# EAGLE board CMOS_Synthesizer_V2_REVB (EAGLE 9.6.2), part 1 of 2
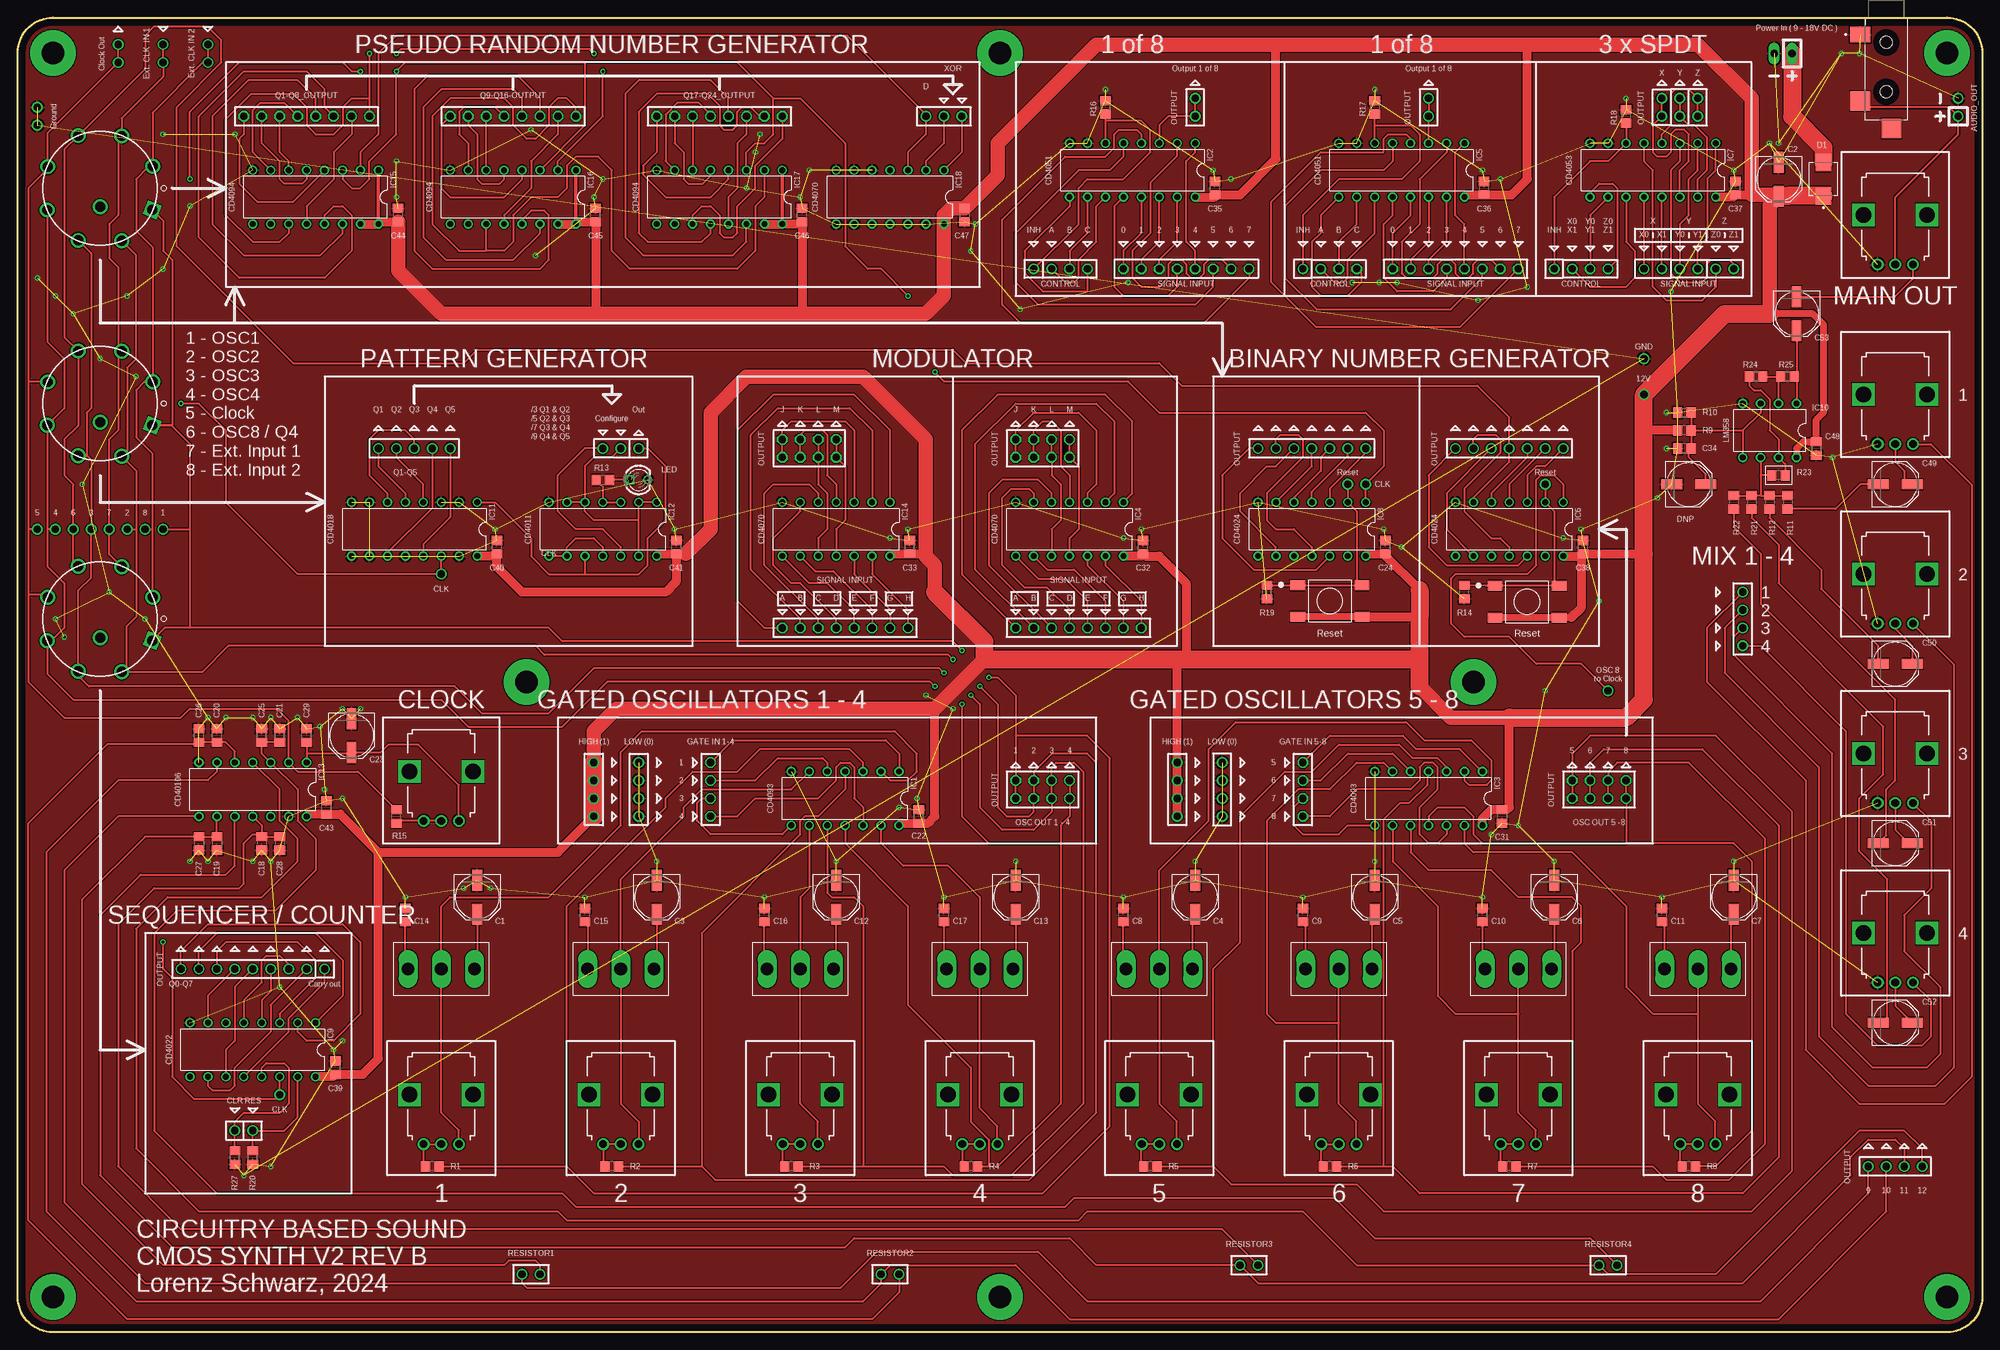
[diagram p0: board, top side]
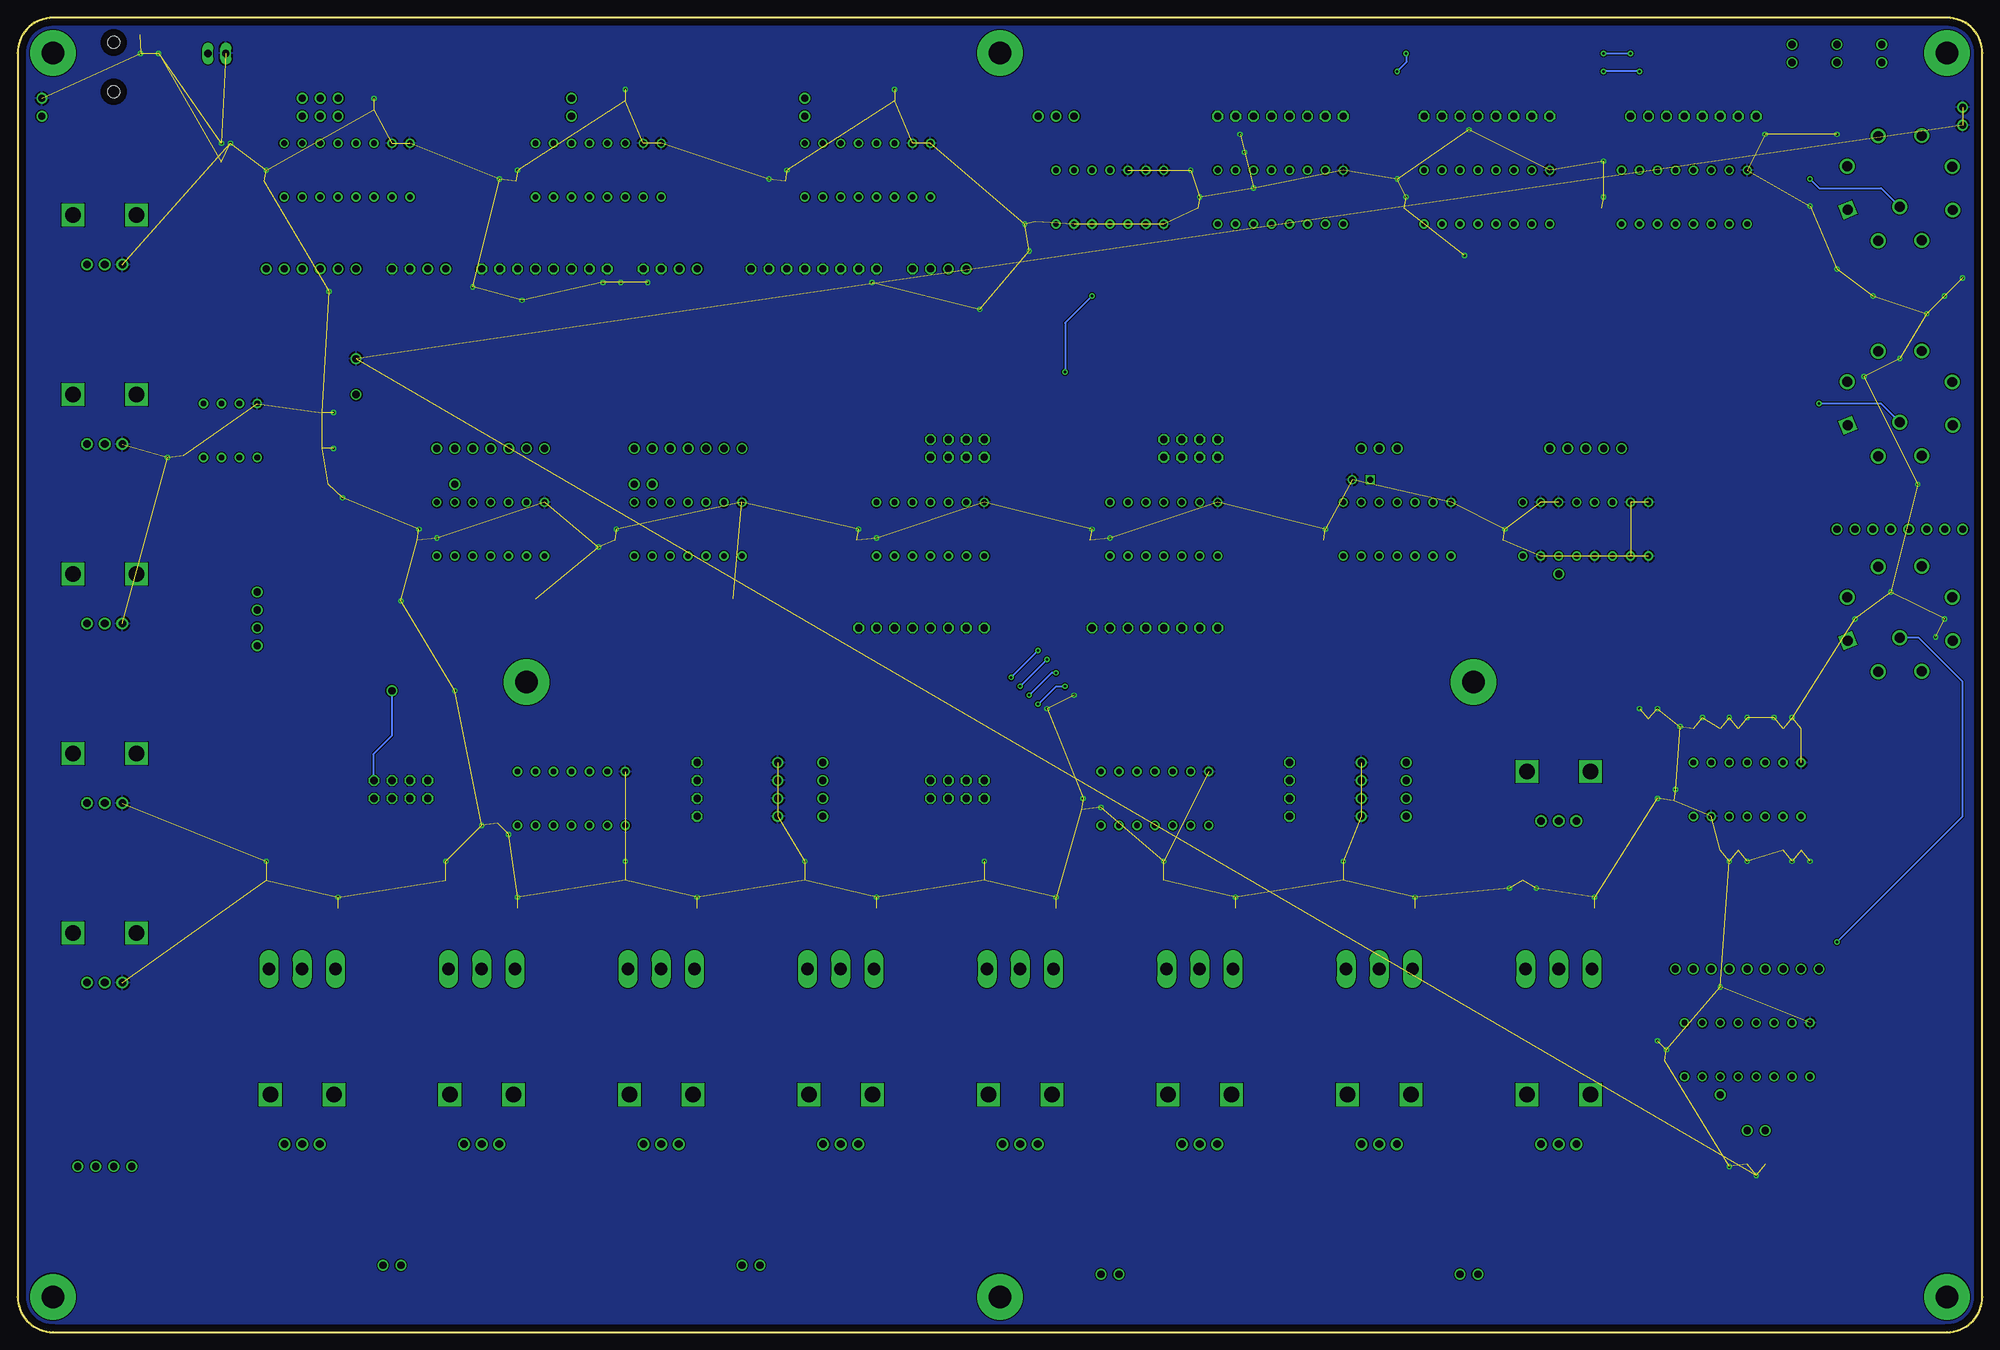
[diagram p1: board, bottom side, seen from below]

Size 278 x 186 mm. Coordinates in mm from the lower left corner, seen from the top.
Outline: 5,0 arc-90 0,5 0,181 arc-90 5,186 273,186 arc-90 278,181 278,5 arc-90 273,0 5,0
Copper layers (1*16): Top 0.035mm / dielectric 1.5mm / Bottom 0.035mm
Design rules "default": minimum track width 6mil, minimum drill 0.35mm, track to track 6mil, track to pad 6mil, pad to pad 6mil, via to via 6mil, smd to smd 6mil, copper to edge 40mil, drill to drill 6mil, minimum pad ring 10mil, minimum via ring 8mil, stop-mask expansion 4mil, vias tented up to drill 0mil, thermal gap 10mil

## Footprints (pad centres in the part's own frame; a part is rotated, then mirrored left to right if it is on the bottom)
1X01 = drill 1.016: 1 0,0
1X04 = drill 1.016 octagon: 1 -3.81,0; 2 -1.27,0; 3 1.27,0; 4 3.81,0
1X03 = drill 1.016 octagon: 1 -2.54,0; 2 0,0 | drill 1.016: 3 2.54,0
1X02 = drill 1.016: 1 -1.27,0; 2 1.27,0
PANASONIC_D = smd 3 x 1.4: + 2.4,0; - -2.4,0
C0805 = smd 1.3 x 1.5: 1 -0.95,0; 2 0.95,0
DIO_MBRS140 = smd 2.5 x 2.2: A 2.35,0; C -2.35,0
1X04' = drill 1.016: 1 -3.81,0; 2 -1.27,0; 3 1.27,0; 4 3.81,0
DIL14 = drill 0.813: 1 -7.62,-3.81; 2 -5.08,-3.81; 3 -2.54,-3.81; 4 0,-3.81; 5 2.54,-3.81; 6 5.08,-3.81; 7 7.62,-3.81; 8 7.62,3.81; 9 5.08,3.81; 10 2.54,3.81; 11 0,3.81; 12 -2.54,3.81; 13 -5.08,3.81; 14 -7.62,3.81
DIL16 = drill 0.813: 1 -8.89,-3.81; 2 -6.35,-3.81; 3 -3.81,-3.81; 4 -1.27,-3.81; 5 1.27,-3.81; 6 3.81,-3.81; 7 6.35,-3.81; 8 8.89,-3.81; 9 8.89,3.81; 10 6.35,3.81; 11 3.81,3.81; 12 1.27,3.81; 13 -1.27,3.81; 14 -3.81,3.81; 15 -6.35,3.81; 16 -8.89,3.81
DIL08 = drill 0.813 pad 1.27: 1 -3.81,-3.81; 2 -1.27,-3.81; 3 1.27,-3.81; 4 3.81,-3.81; 5 3.81,3.81; 6 1.27,3.81; 7 -1.27,3.81; 8 -3.81,3.81
CUI_MJ-3523-SMT-TR = smd 2.8 x 2.2: 1 3.7,2.4 | smd 2.8 x 2.8: 2 3.7,11.8; 10 -0.75,15.7 | hole 1.7: 0,3.5; 0,10.5
1X02' = drill 1.016 long: 1 -1.27,0; 2 1.27,0
1X07 = drill 1.016: 1 -7.62,0; 2 -5.08,0; 3 -2.54,0; 4 0,0; 5 2.54,0; 6 5.08,0; 7 7.62,0
LED2-2.54-D3.0MM = drill 0.813 square: A -1.27,0 | drill 0.813: K 1.27,0
MOUNT_CH32 = drill 3.175 pad 6.452: P$1 0,0
1X08 = drill 1.016: 1 -8.89,0; 2 -6.35,0; 3 -3.81,0; 4 -1.27,0; 5 1.27,0; 6 3.81,0; 7 6.35,0; 8 8.89,0
1X05 = drill 1.016: 1 -5.08,0; 2 -2.54,0; 3 0,0; 4 2.54,0; 5 5.08,0
1X08' = drill 1.016 octagon: 1 -8.89,0; 2 -6.35,0; 3 -3.81,0; 4 -1.27,0; 5 1.27,0; 6 3.81,0; 7 6.35,0; 8 8.89,0
R0805 = smd 1.3 x 1.5: 1 -0.95,0; 2 0.95,0
M9040P = drill 1.778 pad 2.286 long: 1 0,4.699; 2 0,0; 3 0,-4.699
ROTARY = drill 1.4 square: 1 3.072,7.358 | drill 1.4: 2 7.458,3.052; 3 7.402,-3.094; 4 3.096,-7.48; 5 -3.051,-7.424; 6 -7.437,-3.118; 7 -7.38,3.028; 8 -3.074,7.414; A 2.65,0
SW_5-1437565-0 = smd 2.1 x 1.4: 1 -4.55,2.25; 2 4.55,2.25; 3 -4.55,-2.25; 4 4.55,-2.25
POT_VER = drill 1.1 pad 1.676: 1 -2.5,-7; 2 0,-7; 3 2.5,-7 | drill 2.21 pad 2.8 square: M1 4.5,0; M2 -4.5,0

## Placement (x,y rotation side)
1  [1X01]  20.57,113.62 0 top
2  [1X01]  15.49,113.62 0 top
3  [1X01]  10.41,113.62 0 top
4  [1X01]  5.33,113.62 0 top
5  [1X01]  2.79,113.62 0 top
6  [1X01]  7.87,113.62 0 top
7  [1X01]  12.95,113.62 0 top
8  [1X01]  18.03,113.62 0 top
12V  [1X01]  230.12,132.67 0 top
4070_IN1  [1X04]  145.03,99.65 180 top
4070_IN2  [1X04]  155.19,99.65 180 top
4070_IN3  [1X04]  122.17,99.65 180 top
4070_IN4  [1X04]  112.01,99.65 180 top
4070_OUT  [1X04]  145.03,126.32 0 top
4070_OUT1  [1X04]  112.01,123.78 0 top
4070_OUT2  [1X04]  145.03,123.78 0 top
4070_OUT3  [1X04]  112.01,126.32 0 top
ABC_1  [1X03]  186.94,150.45 180 top
ABC_51  [1X03]  148.84,150.45 180 top
ABC_53  [1X03]  222.5,150.45 180 top
AUDIO_OUT  [1X02]  274.57,173.31 90 top
C1  22uF  [PANASONIC_D]  65.02,61.55 270 top
C2  22uF  [PANASONIC_D]  249.17,163.15 270 top
C3  22uF  [PANASONIC_D]  90.42,61.55 270 top
C4  22uF  [PANASONIC_D]  166.62,61.55 270 top
C5  22uF  [PANASONIC_D]  192.02,61.55 270 top
C6  22uF  [PANASONIC_D]  217.42,61.55 270 top
C7  22uF  [PANASONIC_D]  242.82,61.55 270 top
C8  0.22uF  [C0805]  156.46,59.01 90 top
C9  0.22uF  [C0805]  181.86,59.01 90 top
C10  0.22uF  [C0805]  207.26,59.01 90 top
C11  0.22uF  [C0805]  232.66,59.01 90 top
C12  22uF  [PANASONIC_D]  115.82,61.55 270 top
C13  22uF  [PANASONIC_D]  141.22,61.55 270 top
C14  0.22uF  [C0805]  54.86,59.01 90 top
C15  0.22uF  [C0805]  80.26,59.01 90 top
C16  0.22uF  [C0805]  105.66,59.01 90 top
C17  0.22uF  [C0805]  131.06,59.01 90 top
C18  1uF  [C0805]  34.54,69.17 270 top
C19  1uF  [C0805]  28.19,69.17 270 top
C20  1uF  [C0805]  28.19,84.41 90 top
C21  1uF  [C0805]  37.08,84.41 90 top
C22  0.1uF  [C0805]  127.5,72.98 90 top
C23  22uF  [PANASONIC_D]  47.24,84.41 270 top
C24  0.1uF  [C0805]  193.54,111.08 90 top
C25  0.22uF  [C0805]  34.54,84.41 90 top
C26  0.22uF  [C0805]  25.65,84.41 90 top
C27  0.22uF  [C0805]  25.65,69.17 270 top
C28  0.22uF  [C0805]  37.08,69.17 270 top
C29  0.22uF  [C0805]  40.89,84.41 90 top
C31  0.1uF  [C0805]  210.05,72.98 270 top
C32  0.1uF  [C0805]  159.25,111.08 90 top
C33  0.1uF  [C0805]  126.23,111.08 90 top
C34  0.1uF  [C0805]  235.84,125.05 180 top
C35  0.1uF  [C0805]  169.41,161.88 90 top
C36  0.1uF  [C0805]  207.51,161.88 90 top
C37  0.1uF  [C0805]  243.07,161.88 90 top
C38  0.1uF  [C0805]  221.48,111.08 90 top
C39  0.1uF  [C0805]  44.95,37.42 90 top
C40  0.1uF  [C0805]  67.81,111.08 90 top
C41  0.1uF  [C0805]  93.21,111.08 90 top
C43  0.1uF  [C0805]  43.68,74.25 90 top
C44  0.1uF  [C0805]  53.84,158.07 90 top
C45  0.1uF  [C0805]  81.78,158.07 90 top
C46  0.1uF  [C0805]  110.99,158.07 90 top
C47  0.1uF  [C0805]  133.98,158.07 270 top
C48  0.1uF  [C0805]  254.5,125.05 270 top
C49  10uF  [PANASONIC_D]  265.68,119.97 0 top
C50  10uF  [PANASONIC_D]  265.68,94.57 0 top
C51  10uF  [PANASONIC_D]  265.68,69.17 0 top
C52  10uF  [PANASONIC_D]  265.68,43.77 0 top
C53  10uF  [PANASONIC_D]  251.71,144.1 270 top
CLK  [1X01]  37.08,33.61 0 top
CLK_IN_4018  [1X01]  59.94,107.27 0 top
CLK_OUT  [1X02]  14.22,180.93 90 top
CLR  [1X01]  30.73,28.53 0 top
CO_4022  [1X01]  43.43,51.39 0 top
D1  MBRS140  [DIO_MBRS140]  255.52,163.15 90 top
DATA_IN  [1X01]  128.52,172.04 0 top
DIVIDE_ODD_OUTPUT  [1X01]  87.88,125.05 0 top
DNP  10uF  [PANASONIC_D]  236.47,119.97 0 top
EXT_CLK01  [1X02]  20.57,180.93 90 top
EXT_CLK_02  [1X02]  26.92,180.93 90 top
GATE_IN_1-4  [1X04]  98.04,76.79 270 top
GATE_IN_4-8  [1X04]  181.86,76.79 270 top
GND  [1X01]  230.12,137.75 0 top
GND_CON  [1X02]  2.79,172.04 90 top
HIGH1  [1X04']  81.53,76.79 90 top
HIGH(1)  [1X04']  164.08,76.79 90 top
IC1  CD4093  [DIL14]  117.09,75.52 180 top
IC2  CD4051  [DIL16]  157.73,164.42 180 top
IC3  CD4093  [DIL14]  199.64,75.52 180 top
IC4  CD4070  [DIL14]  148.84,113.62 180 top
IC5  CD4051  [DIL16]  195.83,164.42 180 top
IC6  CD4024  [DIL14]  211.07,113.62 180 top
IC7  CD4053  [DIL16]  231.39,164.42 180 top
IC8  CD4024  [DIL14]  183.13,113.62 180 top
IC9  CD4022  [DIL16]  33.27,39.96 180 top
IC10  LM358  [DIL08]  247.9,127.59 180 top
IC11  CD4018  [DIL16]  56.13,113.62 180 top
IC12  CD4011  [DIL14]  82.8,113.62 180 top
IC13  CD40106  [DIL14]  33.27,76.79 180 top
IC14  CD4070  [DIL14]  115.82,113.62 180 top
IC15  CD4094  [DIL16]  42.16,160.61 180 top
IC16  CD4094  [DIL16]  70.1,160.61 180 top
IC17  CD4094  [DIL16]  99.31,160.61 180 top
IC18  CD4070  [DIL14]  123.44,160.61 180 top
IN_1  [1X01]  190.75,119.97 0 top
IN_4011  [1X02]  84.07,125.05 180 top
IN_4040  [1X01]  225.04,90.76 0 top
INH_1  [1X01]  181.86,150.45 0 top
INH_51  [1X01]  143.76,150.45 0 top
INH_53  [1X01]  217.42,150.45 0 top
J1  MJ-3523-SMT-TR  [CUI_MJ-3523-SMT-TR]  264.41,186.01 180 top
JP1  [1X01]  269.49,23.45 0 top
JP2  [1X02]  132.33,172.04 0 top
JP4  [1X02']  249.81,180.93 0 top
JP5  [1X01]  264.41,23.45 0 top
JP6  [1X01]  261.87,23.45 0 top
JP7  [1X01]  266.95,23.45 0 top
JP8  [1X07]  211.07,125.05 0 top
JP9  [1X07]  183.13,125.05 0 top
LED  CX-G302DC  [LED2-2.54-D3.0MM]  87.88,120.61 0 top
LOW1  [1X04']  87.88,76.79 270 top
LOW(0)  [1X04']  170.43,76.79 90 top
MIX_1-4  [1X04']  244.09,100.92 90 top
OSC_OUT  [1X04]  223.77,78.06 0 top
OSC_OUT1  [1X04]  145.03,78.06 0 top
OSC_OUT2  [1X04]  223.77,75.52 0 top
OSC_OUT3  [1X04]  145.03,75.52 0 top
P1  MOUNT_CH  [MOUNT_CH32]  5,5 0 top
P2  MOUNT_CH  [MOUNT_CH32]  5,181 0 top
P3  MOUNT_CH  [MOUNT_CH32]  273,181 0 top
P4  MOUNT_CH  [MOUNT_CH32]  273,5 0 top
P5  MOUNT_CH  [MOUNT_CH32]  139,181 0 top
P6  MOUNT_CH  [MOUNT_CH32]  71.99,92.01 0 top
P7  MOUNT_CH  [MOUNT_CH32]  206,92 0 top
P8  MOUNT_CH  [MOUNT_CH32]  139,5 0 top
Q0-Q7  [1X08]  32,51.39 0 top
Q1-Q5  [1X05]  56.13,125.05 0 top
Q1-Q8_OUTPUT  [1X08']  40.89,172.04 0 top
Q9-Q16-OUTPUT  [1X08']  70.1,172.04 0 top
Q17-Q24_OUTPUT  [1X08']  99.31,172.04 0 top
R1  2.7k  [R0805]  58.67,23.45 180 top
R2  2.7k  [R0805]  84.07,23.45 180 top
R3  2.7k  [R0805]  109.47,23.45 180 top
R4  2.7k  [R0805]  134.87,23.45 180 top
R5  2.7k  [R0805]  160.27,23.45 180 top
R6  2.7k  [R0805]  185.67,23.45 180 top
R7  2.7k  [R0805]  211.07,23.45 180 top
R8  2.7k  [R0805]  236.47,23.45 180 top
R9  100k  [R0805]  235.84,127.59 180 top
R10  100k  [R0805]  235.84,130.13 0 top
R11  100k  [R0805]  250.44,117.43 270 top
R12  100k  [R0805]  247.9,117.43 270 top
R13  2.7k  [R0805]  82.8,120.61 0 top
R14  10k  [R0805]  204.72,104.73 90 top
R15  2.7k  [R0805]  53.59,72.98 90 top
R16  10k  [R0805]  153.92,173.31 270 top
R17  10k  [R0805]  192.02,173.31 270 top
R18  10k  [R0805]  227.58,172.04 270 top
R19  10k  [R0805]  176.78,104.73 90 top
R20  10k  [R0805]  33.27,24.72 90 top
R21  100k  [R0805]  245.36,117.43 270 top
R22  100k  [R0805]  242.82,117.43 270 top
R23  [R0805]  249.17,121.24 180 top
R24  100k  [R0805]  246,135.21 180 top
R25  100k  [R0805]  250.44,135.21 180 top
R27  10k  [R0805]  30.73,24.72 90 top
RES  [1X01]  33.27,28.53 0 top
RES_1  [1X01]  188.21,119.97 0 top
RES_4040  [1X01]  216.15,119.97 0 top
RESISTOR1  [1X02]  72.64,8.21 0 top
RESISTOR2  [1X02]  123.44,8.21 0 top
RESISTOR3  [1X02]  174.24,9.48 0 top
RESISTOR4  [1X02]  225.04,9.48 0 top
S1  [M9040P]  59.94,51.39 270 top
S2  [M9040P]  85.34,51.39 270 top
S3  [M9040P]  110.74,51.39 270 top
S4  [M9040P]  136.14,51.39 270 top
S5  [M9040P]  161.54,51.39 270 top
S6  [M9040P]  186.94,51.39 270 top
S7  [M9040P]  212.34,51.39 270 top
S8  [M9040P]  237.74,51.39 270 top
S9  ROTARY_SWITCH  [ROTARY]  11.68,161.88 270 top
S10  ROTARY_SWITCH  [ROTARY]  11.68,100.92 270 top
S11  ROTARY_SWITCH  [ROTARY]  11.68,131.4 270 top
S12  5-1437565-0  [SW_5-1437565-0]  213.59,103.34 0 top
S13  5-1437565-0  [SW_5-1437565-0]  185.67,103.46 0 top
U$1  100k  [POT_VER]  161.54,33.61 0 top
U$2  100k  [POT_VER]  186.94,33.61 0 top
U$3  100k  [POT_VER]  212.34,33.61 0 top
U$4  100k  [POT_VER]  237.74,33.61 0 top
U$5  100k  [POT_VER]  59.94,33.61 0 top
U$6  100k  [POT_VER]  85.34,33.61 0 top
U$7  100k  [POT_VER]  110.74,33.61 0 top
U$8  100k  [POT_VER]  136.14,33.61 0 top
U$9  100k  [POT_VER]  265.68,132.67 0 top
U$10  100k  [POT_VER]  265.68,107.27 0 top
U$11  100k  [POT_VER]  265.68,81.87 0 top
U$12  100k  [POT_VER]  265.68,56.47 0 top
U$13  100k  [POT_VER]  265.68,158.07 0 top
U$14  100k  [POT_VER]  59.94,79.33 0 top
X  [1X02]  232.66,173.31 90 top
X0_  [1X01]  230.12,150.45 0 top
X1_  [1X01]  232.66,150.45 0 top
X0123_1  [1X04]  198.37,150.45 180 top
X0123_51  [1X04]  160.27,150.45 180 top
X4567_1  [1X04]  208.53,150.45 180 top
X4567_51  [1X04]  170.43,150.45 180 top
XOUT  [1X02]  166.62,173.31 270 top
XOUT1  [1X02]  199.64,173.31 90 top
Y  [1X02]  235.2,173.31 90 top
Y0_  [1X01]  235.2,150.45 0 top
Y1_  [1X01]  237.74,150.45 0 top
Z  [1X02]  237.74,173.31 270 top
Z0  [1X01]  240.28,150.45 0 top
Z1  [1X01]  242.82,150.45 0 top

## Library data of the parts
1-8 12V AUDIO_OUT CLK CLK_IN_4018 CLK_OUT CLR CO_4022 DATA_IN DIVIDE_ODD_OUTPUT EXT_CLK01 EXT_CLK_02 GND GND_CON IN_1 IN_4011 IN_4040 INH_1 INH_51 INH_53 JP1 JP2 JP5-JP7 Q1-Q5 Q1-Q8_OUTPUT Q9-Q16-OUTPUT Q17-Q24_OUTPUT RES RES_1 RES_4040 RESISTOR1-RESISTOR4 X X0_ X1_ XOUT XOUT1 Y Y0_ Y1_ Z Z0 Z1 = pinhead01
4070_IN1-4070_IN4 4070_OUT 4070_OUT1-4070_OUT3 GATE_IN_1-4 GATE_IN_4-8 JP4 OSC_OUT OSC_OUT1-OSC_OUT3 Q0-Q7 X0123_1 X0123_51 X4567_1 X4567_51 = pinhead-1
ABC_1 ABC_51 ABC_53 HIGH1 HIGH(1) JP8 JP9 LOW1 LOW(0) MIX_1-4 = pinhead_mod
C1-C29 C31-C41 C43-C53 DNP = rcl; SPICEPREFIX: C
D1 = MBRS140; AVAILABILITY: Unavailable; DESCRIPTION: Diode Schottky 40V 1A Surface Mount SMB _DO-214AA_; MF: ON; MP: MBRS140; PACKAGE: DO-214 Fairchild Semiconductor; PRICE: None
IC1 IC3 IC4 IC6-IC9 IC11-IC14 IC18 = 40xx_edit
IC2 IC5 IC15-IC17 = 40xx_FP_mod
IC10 = linear
J1 = MJ-3523-SMT-TR; AVAILABILITY: In Stock; CHECK_PRICES: https://www.snapeda.com/parts/MJ-3523-SMT-TR/CUI+Devices/view-part/?ref=eda; CUI_PURCHASE_URL: https://www.cuidevices.com/product/interconnect/connectors/audio-connectors/jacks/mj-3523-smt-tr?utm_source=snapeda.com&utm_medium=referral&utm_campaign=snapedaBOM; DESCRIPTION: 3.5 mm, Mono, Right Angle, Surface Mount (SMT), 2 Conductors, 1 Internal Switch, Audio Jack Connector; MF: CUI Devices; MP: MJ-3523-SMT-TR; PACKAGE: None; PRICE: None; SNAPEDA_LINK: https://www.snapeda.com/parts/MJ-3523-SMT-TR/CUI+Devices/view-part/?ref=snap
LED = OPL_Optoelectronics; MPN: CX-G302DC
P1-P8 = sol_pin
R1-R25 R27 = rcl; SPICEPREFIX: R
S1-S8 = switch_mod
S9-S11 = SP8T_Rotary
S12 S13 = 5-1437565-0; AVAILABILITY: In Stock; COMMENT: 5-1437565-0; DESCRIPTION: Switch Push Button N.O. SPST Round Button 0.05A 12VDC 1VA Alternate Contact Gull Wing SMD T/R; MF: TE Connectivity; MP: FSM6JSMATR; PACKAGE: None; PRICE: None; PURCHASE-URL: https://pricing.snapeda.com/search/part/FSM6JSMATR/?ref=eda
U$1-U$14 = Pot_Vertical

## Nets
+12V: 12V.1 C2.+ C22.1 C24.1 C31.1 C32.1 C33.1 C35.1 C36.1 C37.1 C38.1 C39.1 C40.1 C41.1 C43.1 C44.1 C45.1 C46.1 C47.1 C48.1 D1.C HIGH1.1 HIGH1.2 HIGH1.3 HIGH1.4 HIGH(1).1 HIGH(1).2 HIGH(1).3 HIGH(1).4 IC1.14 IC2.16 IC3.14 IC4.14 IC5.16 IC6.14 IC7.16 IC8.14 IC9.16 IC10.8 IC11.16 IC12.14 IC13.14 IC14.14 IC15.1 IC15.15 IC15.16 IC16.1 IC16.15 IC16.16 IC17.1 IC17.15 IC17.16 IC18.14 R9.2 S12.3 S12.4 S13.3 S13.4
A1: GATE_IN_4-8.1 IC3.1
A2: GATE_IN_1-4.1 IC1.1
B1: GATE_IN_4-8.2 IC3.5
B2: GATE_IN_1-4.2 IC1.5
C1: GATE_IN_4-8.3 IC3.8
C2: GATE_IN_1-4.3 IC1.8
CLK_SEL1: IC8.1 IC15.3 IC16.3 IC17.3 IN_1.1 S9.A
CLK_SEL2: CLK.1 IC9.14 S10.A
CLK_SEL3: CLK_IN_4018.1 IC11.14 S11.A
D1: GATE_IN_4-8.4 IC3.12
D2: GATE_IN_1-4.4 IC1.12
DATA_DIVIDE: DIVIDE_ODD_OUTPUT.1 IC11.1 IC12.10
DIV4: 6.1 IC6.6 JP8.4 S9.6 S10.6 S11.6
GND: AUDIO_OUT.2 C1.- C2.- C3.- C4.- C5.- C6.- C7.- C8.2 C9.2 C10.2 C11.2 C12.- C13.- C14.2 C15.2 C16.2 C17.2 C18.2 C19.2 C20.2 C21.2 C22.2 C23.- C24.2 C25.2 C26.2 C27.2 C28.2 C29.2 C31.2 C32.2 C33.2 C34.2 C35.2 C36.2 C37.2 C38.2 C39.2 C40.2 C41.2 C43.2 C44.2 C45.2 C46.2 C47.2 C48.2 DNP.- GND.1 GND_CON.1 GND_CON.2 IC1.7 IC2.7 IC2.8 IC3.7 IC4.7 IC5.7 IC5.8 IC6.7 IC7.7 IC7.8 IC8.7 IC9.8 IC10.4 IC11.2 IC11.3 IC11.7 IC11.8 IC11.9 IC11.10 IC11.12 IC11.15 IC12.7 IC13.7 IC13.13 IC14.7 IC15.8 IC16.8 IC17.8 IC18.5 IC18.6 IC18.7 IC18.8 IC18.9 IC18.12 IC18.13 J1.1 JP4.1 LED.K LOW1.1 LOW1.2 LOW1.3 LOW1.4 LOW(0).1 LOW(0).2 LOW(0).3 LOW(0).4 R10.1 R14.1 R16.1 R17.1 R18.1 R19.1 R20.1 R27.1 U$9.1 U$10.1 U$11.1 U$12.1 U$13.1
LDR1: IC13.8 JP6.1 RESISTOR1.1
LDR2: IC13.6 JP5.1 RESISTOR2.1
LDR3: IC13.10 JP7.1 RESISTOR3.1
LDR4: IC13.4 JP1.1 RESISTOR4.1
LFO: 5.1 CLK_OUT.1 CLK_OUT.2 IC13.2 R15.2 S9.5 S10.5 S11.5
N$1: C5.+ S6.1
N$2: D1.A JP4.2
N$3: C9.1 S6.3
N$4: C8.1 S5.3
N$5: 4070_OUT2.1 4070_OUT.1 IC4.3
N$6: 4070_OUT2.2 4070_OUT.2 IC4.4
N$7: 4070_OUT2.3 4070_OUT.3 IC4.10
N$8: 4070_OUT2.4 4070_OUT.4 IC4.11
N$9: 4070_IN1.4 IC4.1
N$10: C4.+ S5.1
N$11: IC3.2 S5.2 U$1.3
N$12: IC3.6 S6.2 U$2.3
N$13: C23.+ C29.1 IC13.1 U$14.3
N$14: R15.1 U$14.1 U$14.2
N$15: C6.+ S7.1
N$16: C10.1 S7.3
N$17: IC3.9 S7.2 U$3.3
N$18: IC5.12 X0123_1.1
N$19: C7.+ S8.1
N$20: C11.1 S8.3
N$21: IC3.13 S8.2 U$4.3
N$22: IC5.15 X0123_1.2
N$23: 4070_IN1.3 IC4.2
N$24: R5.2 U$1.1 U$1.2
N$25: R6.2 U$2.1 U$2.2
N$26: R7.2 U$3.1 U$3.2
N$27: R8.2 U$4.1 U$4.2
N$28: 4070_IN1.2 IC4.5
N$29: 4070_IN1.1 IC4.6
N$30: 4070_IN2.4 IC4.8
N$31: 4070_IN2.3 IC4.9
N$32: 4070_IN2.2 IC4.12
N$33: 4070_IN2.1 IC4.13
N$34: C1.+ S1.1
N$35: IC1.2 S1.2 U$5.3
N$36: IC5.14 X0123_1.3
N$37: IC5.13 X0123_1.4
N$38: IC7.4 Z.1 Z.2
N$39: IC7.15 Y.1 Y.2
N$40: IC7.14 X.1 X.2
N$41: IC7.6 INH_53.1 R18.2
N$42: ABC_53.1 IC7.9
N$43: ABC_53.2 IC7.10
N$44: ABC_53.3 IC7.11
N$45: IC7.13 X1_.1
N$46: C3.+ S2.1
N$47: C15.1 S2.3
N$48: IC1.6 S2.2 U$6.3
N$49: C12.+ S3.1
N$50: C16.1 S3.3
N$51: IC1.9 S3.2 U$7.3
N$52: IC5.4 X4567_1.1
N$53: C13.+ S4.1
N$54: IC7.12 X0_.1
N$55: IC7.1 Y1_.1
N$56: IC7.2 Y0_.1
N$57: IC7.3 Z1.1
N$58: IC7.5 Z0.1
N$59: IC5.2 X4567_1.2
N$60: IC5.5 X4567_1.3
N$61: IC5.1 X4567_1.4
N$62: IC5.6 INH_1.1 R17.2
N$63: ABC_1.1 IC5.9
N$64: ABC_1.2 IC5.10
N$65: ABC_1.3 IC5.11
N$66: IC5.3 XOUT1.1 XOUT1.2
N$68: IC2.12 X0123_51.1
N$69: IC2.15 X0123_51.2
N$70: IC2.14 X0123_51.3
N$71: IC2.13 X0123_51.4
N$72: IC2.4 X4567_51.1
N$73: IC2.2 X4567_51.2
N$74: IC2.5 X4567_51.3
N$75: IC2.1 X4567_51.4
N$76: IC2.6 INH_51.1 R16.2
N$77: ABC_51.1 IC2.9
N$78: ABC_51.2 IC2.10
N$79: ABC_51.3 IC2.11
N$80: IC2.3 XOUT.1 XOUT.2
N$81: IC6.11 JP8.2
N$82: IC8.12 JP9.1
N$83: IC8.11 JP9.2
N$84: IC8.9 JP9.3
N$85: IC6.4 JP8.6
N$86: IC9.2 Q0-Q7.1
N$87: IC9.1 Q0-Q7.2
N$88: IC9.3 Q0-Q7.3
N$89: IC9.7 Q0-Q7.4
N$90: IC9.11 Q0-Q7.5
N$91: IC9.4 Q0-Q7.6
N$92: IC9.5 Q0-Q7.7
N$93: IC9.10 Q0-Q7.8
N$94: CO_4022.1 IC9.12
N$95: IC9.15 R20.2 RES.1
N$97: CLR.1 IC9.13 R27.2
N$98: IC6.12 JP8.1
N$100: IC6.9 JP8.3
N$102: IC6.5 JP8.5
N$104: IC6.3 JP8.7
N$109: IC8.6 JP9.4
N$110: IC6.2 R14.2 RES_4040.1 S12.1 S12.2
N$111: C49.+ U$9.2
N$112: C50.+ U$10.2
N$113: IC10.6 R11.1 R12.1 R21.1 R22.1 R23.2
N$114: IC10.2 R24.1 R25.2
N$115: IC10.7 R23.1 R24.2
N$116: C53.+ IC10.1 R25.1
N$117: C51.+ U$11.2
N$118: C52.+ U$12.2
N$120: IC12.8 IC12.9 IC12.11
N$121: IC12.3 IC12.4 R13.1
N$122: IC12.12 IN_4011.2
N$123: C17.1 S4.3
N$124: LED.A R13.2
N$125: IC11.5 Q1-Q5.1
N$126: IC11.4 Q1-Q5.2
N$127: IC11.6 Q1-Q5.3
N$128: IC11.11 Q1-Q5.4
N$129: IC11.13 Q1-Q5.5
N$130: IC1.13 S4.2 U$8.3
N$131: IC12.1 IC12.2 IC12.5 IC12.6 IC12.13 IN_4011.1
N$132: IC8.5 JP9.5
N$133: R1.2 U$5.1 U$5.2
N$134: R2.2 U$6.1 U$6.2
N$135: R3.2 U$7.1 U$7.2
N$136: R4.2 U$8.1 U$8.2
N$137: C14.1 S1.3
N$138: 4070_OUT1.1 4070_OUT3.1 IC14.3
N$139: IC8.4 JP9.6
N$140: IC8.3 JP9.7
N$141: 4070_OUT1.2 4070_OUT3.2 IC14.4
N$142: 4070_OUT1.3 4070_OUT3.3 IC14.10
N$146: IC8.2 R19.2 RES_1.1 S13.1 S13.2
N$149: C21.1 C25.1 IC13.3 RESISTOR4.2
N$150: C20.1 C26.1 IC13.5 RESISTOR2.2
N$151: 4070_OUT1.4 4070_OUT3.4 IC14.11
N$152: C19.1 C27.1 IC13.9 RESISTOR1.2
N$153: 4070_IN4.4 IC14.1
N$154: C18.1 C28.1 IC13.11 RESISTOR3.2
N$155: 4070_IN4.3 IC14.2
N$156: 4070_IN4.2 IC14.5
N$157: 4070_IN4.1 IC14.6
N$158: 4070_IN3.4 IC14.8
N$159: 4070_IN3.3 IC14.9
N$160: 4070_IN3.2 IC14.12
N$161: 4070_IN3.1 IC14.13
N$162: IC15.11 IC16.2 Q1-Q8_OUTPUT.8
N$164: IC16.11 IC17.2 Q9-Q16-OUTPUT.8
N$165: IC17.11 Q17-Q24_OUTPUT.8
N$169: DATA_IN.1 IC15.2 IC18.3
N$170: IC15.12 Q1-Q8_OUTPUT.7
N$171: IC15.13 Q1-Q8_OUTPUT.6
N$172: IC15.14 Q1-Q8_OUTPUT.5
N$173: IC15.7 Q1-Q8_OUTPUT.4
N$174: IC15.6 Q1-Q8_OUTPUT.3
N$175: IC15.5 Q1-Q8_OUTPUT.2
N$176: IC15.4 Q1-Q8_OUTPUT.1
N$177: IC16.4 Q9-Q16-OUTPUT.1
N$178: IC16.5 Q9-Q16-OUTPUT.2
N$179: IC16.6 Q9-Q16-OUTPUT.3
N$180: IC16.7 Q9-Q16-OUTPUT.4
N$181: IC16.14 Q9-Q16-OUTPUT.5
N$182: IC16.13 Q9-Q16-OUTPUT.6
N$183: IC16.12 Q9-Q16-OUTPUT.7
N$184: IC17.4 Q17-Q24_OUTPUT.1
N$185: IC17.5 Q17-Q24_OUTPUT.2
N$186: IC17.6 Q17-Q24_OUTPUT.3
N$187: IC17.7 Q17-Q24_OUTPUT.4
N$188: IC17.14 Q17-Q24_OUTPUT.5
N$189: IC17.13 Q17-Q24_OUTPUT.6
N$190: IC17.12 Q17-Q24_OUTPUT.7
N$191: IC18.1 JP2.2
N$192: IC18.2 JP2.1
N$193: C52.- R22.2
N$194: C51.- R21.2
N$195: C50.- R12.2
N$196: C49.- R11.2
N$197: MIX_1-4.4 U$9.3
N$198: MIX_1-4.3 U$10.3
N$199: MIX_1-4.2 U$11.3
N$200: MIX_1-4.1 U$12.3
N$201: C53.- U$13.3
N$202: AUDIO_OUT.1 J1.2 U$13.2
OSC1: 1.1 IC1.3 OSC_OUT1.1 OSC_OUT3.1 R1.1 S9.1 S10.1 S11.1
OSC2: 2.1 IC1.4 OSC_OUT1.2 OSC_OUT3.2 R2.1 S9.2 S10.2 S11.2
OSC3: 3.1 IC1.10 OSC_OUT1.3 OSC_OUT3.3 R3.1 S9.3 S10.3 S11.3
OSC4: 4.1 IC1.11 OSC_OUT1.4 OSC_OUT3.4 R4.1 S9.4 S10.4 S11.4
OSC5: IC3.3 OSC_OUT2.1 OSC_OUT.1 R5.1
OSC6: IC3.4 OSC_OUT2.2 OSC_OUT.2 R6.1
OSC7: IC3.10 OSC_OUT2.3 OSC_OUT.3 R7.1
OSC8: IC3.11 IC6.1 IN_4040.1 OSC_OUT2.4 OSC_OUT.4 R8.1
REF: C34.1 DNP.+ IC10.3 IC10.5 R9.1 R10.2
SIG7: 7.1 EXT_CLK01.1 EXT_CLK01.2 S9.7 S10.7 S11.7
SIG8: 8.1 EXT_CLK_02.1 EXT_CLK_02.2 S9.8 S10.8 S11.8